# Altium PCB USBAERmini2PCB.PCBDOC (part 2 of 2)
Units mm, origin at the board's own origin, x right, y up, seen from the top; angles counter-clockwise.
Board outline 159.12 x 127.1 mm, 2 copper layers (Top Layer, Bottom Layer); 87 components, 131 nets, 595 pads, 148 vias.
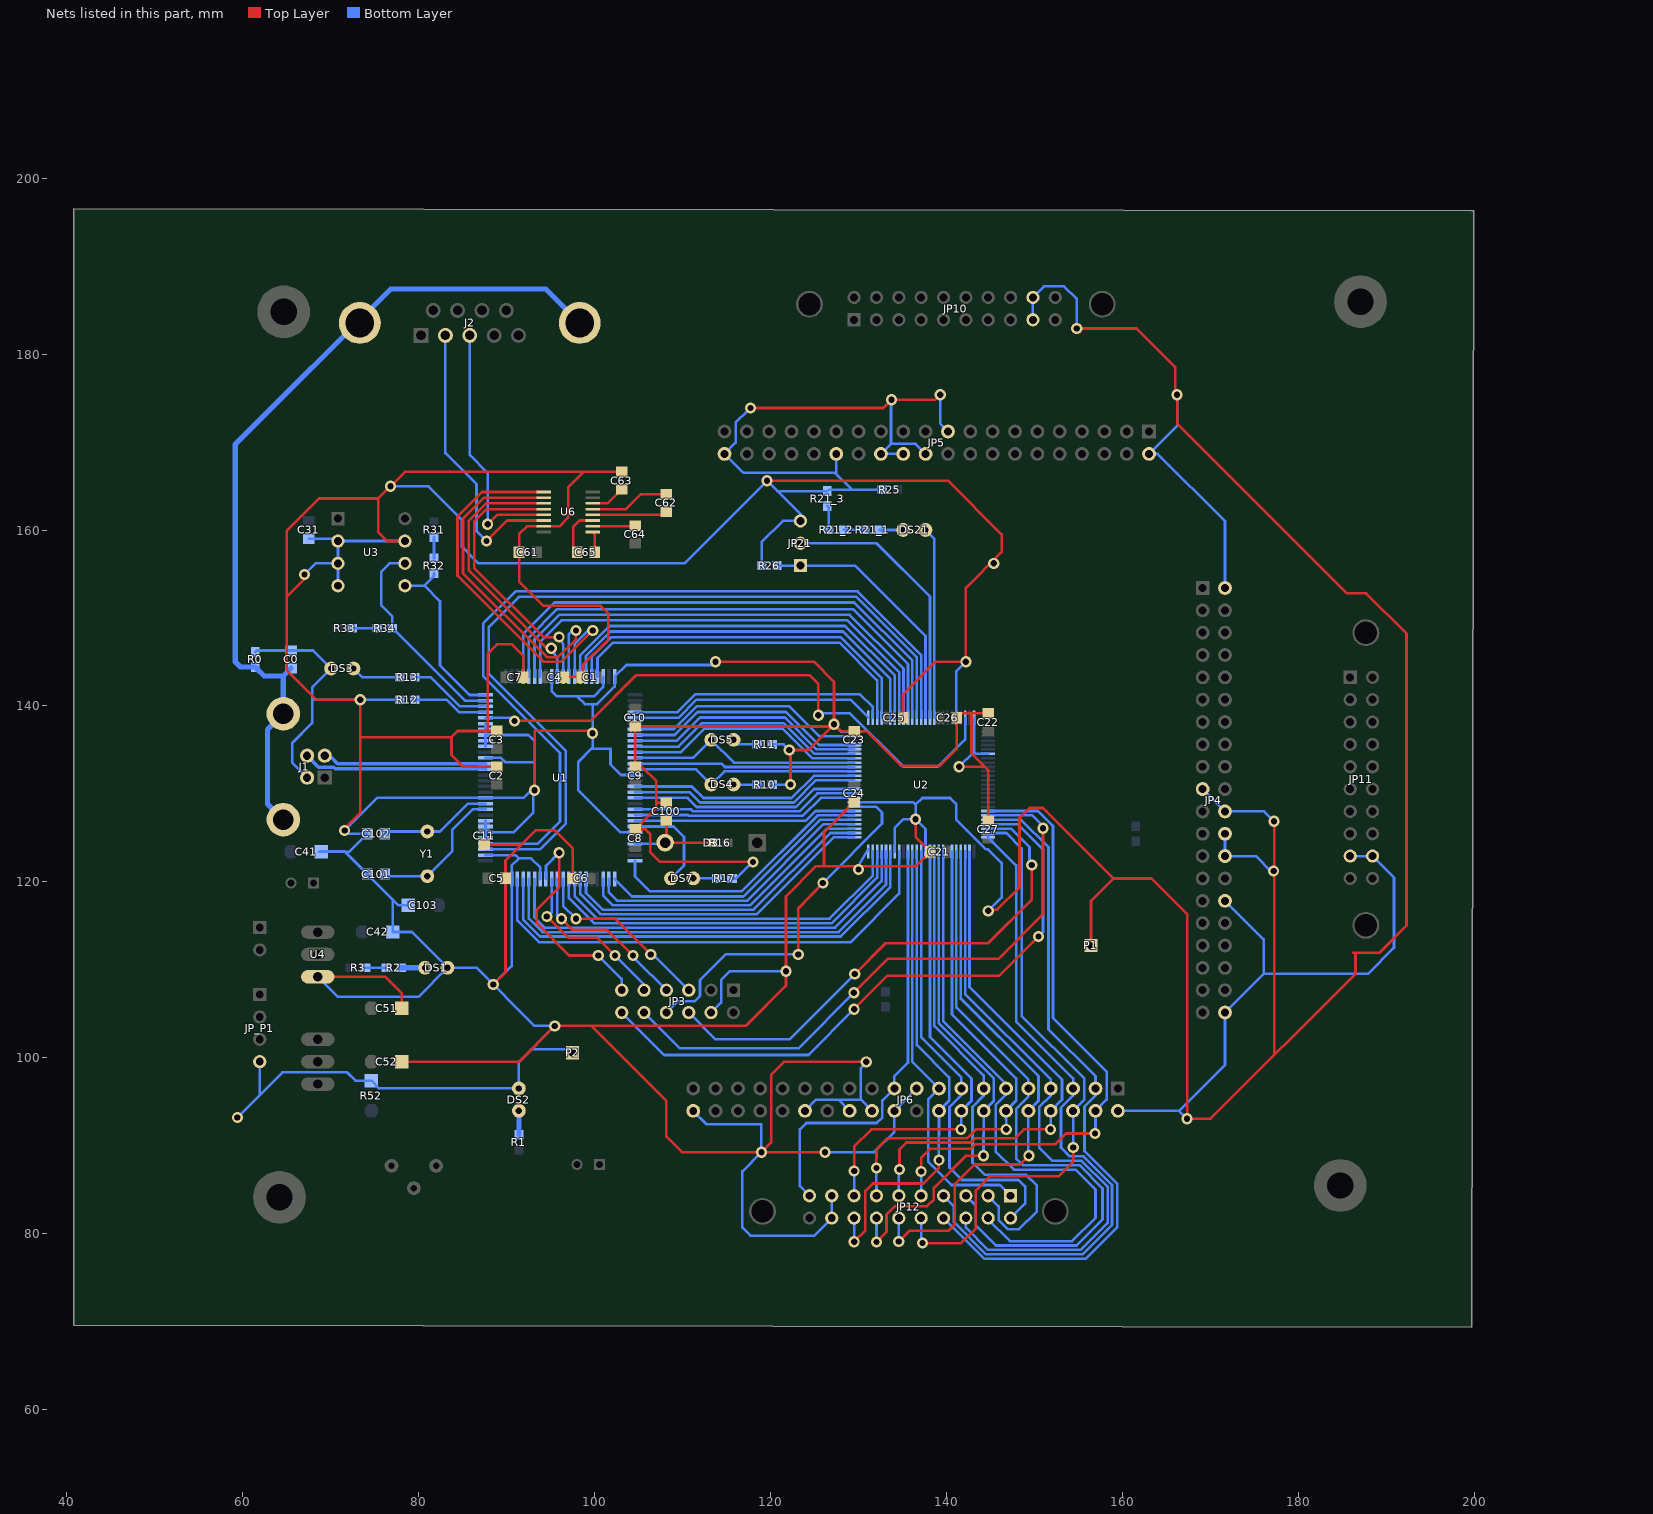
[diagram p2: the nets of this part, all layers, seen from the top]

## Via types
v1: diameter 1.27, hole 0.711, Top Layer to Bottom Layer, 148 vias

## Nets (pads, with @x,y where several pads share a name; then routed paths per layer and width w, separated by ;. In a path a pad name is that pad's centre, name@x,y a point inside that pad or via, vN(x,y) a via of type N, cw(c..) or ccw(c..) an arc to the next point about the centre after c; other vN are vias at no path point) (continued)
AERSEQADD0: JP6.17 JP12.1 U2.65 | length 48
  Bottom Layer w0.3: U2.65@136.16,123.464 136.16,99.554 JP6.17@139.191,96.523 137.975,95.307 137.975,88.175 140.6,85.55 146.098,85.55 JP12.1@147.32,84.328
AERSEQADD1: JP6.15 JP12.2 U2.63 | length 52.2
  Bottom Layer w0.3: U2.63@137.16,123.464 137.16,102.362 141.731,97.791 141.731,95.781 140.375,94.425 140.375,87.525 141.775,86.125 148.225,86.125 148.975,85.375 148.975,83.443 JP12.2@147.32,81.788
AERSEQADD2: JP6.13 JP12.3 U2.60 | length 58.4
  Bottom Layer w0.3: U2.60@138.66,123.464 138.66,103.601 144.271,97.99 144.271,95.696 143,94.425 143,88.1 144.4,86.7 149.075,86.7 150.3,85.475 150.3,82.55 148.275,80.525 147,80.525 145.975,81.55 145.975,83.133 JP12.3@144.78,84.328
AERSEQADD3: JP6.11 JP12.4 U2.58 | length 68.4
  Bottom Layer w0.3: U2.58@139.66,123.464 139.66,104.18 146.811,97.029 146.811,95.816 145.625,94.63 145.625,89.375 147.7,87.3 154.7,87.3 156.975,85.025 156.975,81.825 154.325,79.175 147.25,79.175 144.78,81.645 JP12.4@144.78,81.788
AERSEQADD4: JP6.9 JP12.5 U2.55 | length 74.1
  Bottom Layer w0.3: U2.55@141.16,123.464 141.16,105.728 149.351,97.537 149.351,95.601 147.95,94.2 147.95,88.575 148.725,87.8 155.15,87.8 157.775,85.175 157.775,81.625 154.825,78.675 145.65,78.675 143.375,80.95 143.375,83.193 JP12.5@142.24,84.328
AERSEQADD5: JP6.7 JP12.6 U2.53 | length 71.5
  Bottom Layer w0.3: U2.53@142.16,123.464 142.16,107.268 151.891,97.537 151.891,95.741 150.575,94.425 150.575,89.825 152.1,88.3 155.411,88.3 158.35,85.361 158.35,81.232 155.293,78.175 144.775,78.175 142.24,80.71 JP12.6@142.24,81.788
AERSEQADD6: JP6.5 JP12.7 U2.50 | length 76.3
  Bottom Layer w0.3: JP12.7@139.7,84.328 140.9,83.128 140.9,81.325 144.55,77.675 155.5,77.675 158.85,81.025 158.85,85.568 155.618,88.8 154.05,88.8 153.05,89.8 153.05,94.35 154.431,95.731 154.431,97.664 147.955,104.14 147.955,121.869 U2.50@144.76,125.064
AERSEQADD7: JP6.3 JP12.8 U2.46 | length 78.8
  Bottom Layer w0.3: JP12.8@139.7,81.788 144.313,77.175 155.875,77.175 159.45,80.75 159.45,85.675 155.725,89.4 155.725,94.475 156.971,95.721 156.971,97.918 151.638,103.251 151.638,123.952 148.526,127.064 U2.46@144.76,127.064
AERSEQADD8: JP6.4 JP12.9 U2.44 | length 71.3
  Top Layer w0.3: v1(137.16,87.09) 137.16,88.635 138.2,89.675 142.807,89.675 143.332,90.2 152.425,90.2 153.625,91.4 v1(156.925,91.4)
  Bottom Layer w0.3: JP12.9@137.16,84.328 v1(137.16,87.09) ; U2.44@144.76,128.064 150.447,128.064 152.138,126.373 152.138,104.529 158.242,98.425 158.242,95.254 JP6.4@156.971,93.983 156.971,91.446 v1(156.925,91.4)
AERSEQADD9: JP6.6 JP12.10 U2.49 | length 69.8
  Top Layer w0.3: v1(137.3,78.95) 141.7,78.95 143.375,80.625 143.375,84.95 144.975,86.55 152.8,86.55 154.45,88.2 v1(154.45,89.8)
  Bottom Layer w0.3: v1@137.16,79.16 JP12.10@137.16,81.788 ; U2.49@144.76,125.564 146.851,125.564 148.59,123.825 148.59,104.775 155.702,97.663 155.702,95.254 JP6.6@154.431,93.983 v1(154.45,89.8)
AERSEQADD10: JP6.8 JP12.11 U2.52 | length 59.6
  Top Layer w0.3: v1(134.7,87.325) 134.7,89.6 135.475,90.375 142.8,90.375 143.275,90.85 147.8,90.85 148.825,91.875 v1(151.875,91.875)
  Bottom Layer w0.3: JP12.11@134.62,84.328 v1@134.62,87.12 ; U2.52@142.66,123.464 142.66,108.038 153.162,97.536 153.162,95.254 JP6.8@151.891,93.983 v1(151.875,91.875)
AERSEQADD11: JP6.10 JP12.12 U2.54 | length 62.9
  Top Layer w0.3: v1(134.62,79.12) 135.85,80.35 140.275,80.35 140.975,81.05 140.975,85.6 143.25,87.875 148.4,87.875 v1(149.4,88.875)
  Bottom Layer w0.3: v1(134.62,79.12) JP12.12@134.62,81.788 ; U2.54@141.66,123.464 141.66,106.752 150.495,97.917 150.495,95.127 JP6.10@149.351,93.983 149.351,88.924 v1(149.4,88.875)
AERSEQADD12: JP6.12 JP12.13 U2.56 | length 56
  Top Layer w0.3: v1(132.075,87.475) 132.08,89.605 133.35,90.875 142.4,90.875 143.4,91.875 v1(146.825,91.875)
  Bottom Layer w0.3: v1(132.075,87.475) JP12.13@132.08,84.328 ; U2.56@140.66,123.464 140.66,104.958 147.955,97.663 147.955,95.127 JP6.12@146.811,93.983 v1(146.825,91.875)
AERSEQADD13: JP6.14 JP12.14 U2.59 | length 58.5
  Top Layer w0.3: v1(132.08,79.07) 133.225,80.215 133.225,82.2 134.175,83.15 137.85,83.15 138.6,83.9 138.6,85.225 142.25,88.875 v1(144.25,88.875)
  Bottom Layer w0.3: v1(132.08,79.07) JP12.14@132.08,81.788 ; U2.59@139.16,123.464 139.16,103.918 145.415,97.663 145.415,95.127 JP6.14@144.271,93.983 v1(144.25,88.875)
AERSEQADD14: JP6.16 JP12.15 U2.61 | length 52.6
  Top Layer w0.3: v1(129.54,87.14) 129.54,89.915 131.5,91.875 v1(141.7,91.875)
  Bottom Layer w0.3: JP12.15@129.54,84.328 v1(129.54,87.14) ; U2.61@138.16,123.464 138.16,102.378 142.875,97.663 142.875,95.127 JP6.16@141.731,93.983 v1(141.7,91.875)
AERSEQADD15: JP6.18 JP12.16 U2.64 | length 56.4
  Top Layer w0.3: v1(129.54,79.11) 130.825,80.395 130.825,84.875 131.675,85.725 137.425,85.725 139.175,87.475 v1(139.175,88.375)
  Bottom Layer w0.3: v1(129.54,79.11) JP12.16@129.54,81.788 ; U2.64@136.66,123.464 136.66,101.465 140.335,97.79 140.335,95.127 JP6.18@139.191,93.983 v1(139.175,88.375)
AERSEQREQ: JP6.21 JP12.19 U2.66 | length 49.4
  Bottom Layer w0.3: JP12.19@124.46,84.328 123.375,85.413 123.375,91.875 124.1,92.6 132.1,92.6 132.75,93.25 132.75,95.162 JP6.21@134.111,96.523 134.111,97.916 135.66,99.465 U2.66@135.66,123.464
AGND: C0.2 J1.5 J1.6 J2.10 J2.11 R0.1 | length 97.8
  Bottom Layer w0.6: R0.1@61.468,144.438 59.778,144.438 59.182,145.034 59.182,169.707 76.875,187.4 94.487,187.4 J2.11@98.347,183.54 ; R0.1@61.625,144.281 62.488,143.418 64.656,143.418 ; J1.5@64.656,127.076 62.865,128.867 62.865,137.325 J1.6@64.656,139.116 64.656,143.418 ; C0.2@65.536,144.298 64.656,143.418
CFGEARLYPKT0: U1.58 U2.97 | length 27.6
  Bottom Layer w0.3: U1.58@104.639,136.701 109.142,136.701 111.76,139.319 121.793,139.319 125.548,135.564 U2.97@129.56,135.564
CFGEARLYPKT1: U1.59 U2.96 | length 27.5
  Bottom Layer w0.3: U1.59@104.639,136.051 109.381,136.051 112.014,138.684 121.666,138.684 125.286,135.064 U2.96@129.56,135.064
CFGTS0: U1.60 U2.95 | length 27.2
  Bottom Layer w0.3: U1.60@104.902,135.382 109.601,135.382 112.268,138.049 121.539,138.049 125.024,134.564 U2.95@129.56,134.564
CFGTS1: U1.61 U2.94 | length 27.4
  Bottom Layer w0.3: U1.61@104.639,134.751 109.859,134.751 112.522,137.414 121.412,137.414 124.762,134.064 U2.94@129.56,134.064
DMINUS: J1.2 U1.18 | length 18.6
  Bottom Layer w0.4: J1.2@69.366,134.346 69.929,134.346 70.824,133.451 U1.18@87.639,133.451
DPLUS: J1.3 U1.17 | length 20.9
  Bottom Layer w0.4: J1.3@67.366,134.346 68.662,133.05 70.367,133.05 70.566,132.851 87.589,132.851 U1.17@87.639,132.801
EP2EMPTY: U1.54 U2.2 | length 29.7
  Bottom Layer w0.3: U1.54@104.639,139.301 109.456,139.301 111.506,141.351 130.175,141.351 131.66,139.866 U2.2@131.66,138.664
EP6FULL: U1.55 U2.1 | length 28.2
  Bottom Layer w0.3: U1.55@104.639,138.651 109.568,138.651 111.633,140.716 129.108,140.716 U2.1@131.16,138.664
FD0: U1.34 U2.11 | length 59.8
  Bottom Layer w0.3: U1.34@91.914,143.326 91.914,148.175 95.504,151.765 129.54,151.765 136.16,145.145 U2.11@136.16,138.664
FD1: U1.35 U2.10 | length 57.6
  Bottom Layer w0.3: U1.35@92.564,143.326 92.564,147.809 95.758,151.003 129.413,151.003 135.66,144.756 U2.10@135.66,138.664
FD2: U1.36 U2.9 | length 55.5
  Bottom Layer w0.3: U1.36@93.214,143.326 93.214,147.57 96.012,150.368 129.032,150.368 135.16,144.24 U2.9@135.16,138.664
FD3: U1.37 U2.8 | length 53.4
  Bottom Layer w0.3: U1.37@93.864,143.326 93.864,147.331 96.266,149.733 128.778,149.733 134.66,143.851 U2.8@134.66,138.664
FD4: U1.44 U2.7 | length 46.7
  Bottom Layer w0.3: U1.44@98.414,143.326 98.414,145.785 101.727,149.098 128.524,149.098 134.16,143.462 U2.7@134.16,138.664
FD5: U1.45 U2.6 | length 44.7
  Bottom Layer w0.3: U1.45@99.064,143.326 99.064,145.673 101.854,148.463 128.27,148.463 133.66,143.073 U2.6@133.66,138.664
FD6: U1.46 U2.4 | length 42.6
  Bottom Layer w0.3: U1.46@99.714,143.326 99.714,145.561 101.981,147.828 128.016,147.828 132.66,143.184 U2.4@132.66,138.664
FD7: U1.47 U2.3 | length 40.7
  Bottom Layer w0.3: U1.47@100.364,143.326 100.364,145.449 102.108,147.193 127.889,147.193 132.16,142.922 U2.3@132.16,138.664
FD8: U1.80 U2.81 | length 31
  Bottom Layer w0.3: U1.80@104.639,122.401 104.639,120.636 106.35,118.925 116.766,118.925 125.405,127.564 U2.81@129.56,127.564
FD9: U1.81 U2.80 | length 31.7
  Bottom Layer w0.3: U1.81@102.314,120.326 104.292,118.348 116.951,118.348 125.667,127.064 U2.80@129.56,127.064
FD10: U1.82 U2.79 | length 33.4
  Bottom Layer w0.3: U1.82@101.664,120.326 101.664,118.808 102.624,117.848 117.34,117.848 126.056,126.564 U2.79@129.56,126.564
FD11: U1.83 U2.78 | length 34.5
  Bottom Layer w0.3: U1.83@101.014,120.326 101.014,118.442 102.108,117.348 117.729,117.348 126.445,126.064 U2.78@129.56,126.064
FD12: U1.95 U2.72 | length 49.9
  Bottom Layer w0.3: U1.95@93.214,120.326 93.214,115.955 94.361,114.808 127.381,114.808 132.66,120.087 U2.72@132.66,123.464
FD13: U1.96 U2.71 | length 51.7
  Bottom Layer w0.3: U1.96@92.564,120.326 92.564,115.843 94.107,114.3 127.762,114.3 133.16,119.698 U2.71@133.16,123.464
FD14: U1.97 U2.70 | length 53.5
  Bottom Layer w0.3: U1.97@91.914,120.326 91.914,115.731 93.853,113.792 128.016,113.792 133.66,119.436 U2.70@133.66,123.464
FD15: U1.98 U2.68 | length 56.2
  Bottom Layer w0.3: U1.98@91.264,120.326 91.264,115.619 93.726,113.157 129.159,113.157 134.66,118.658 U2.68@134.66,123.464
FIFOADDR0: U1.71 U2.86 | length 25.9
  Bottom Layer w0.3: U1.71@104.639,128.251 111.017,128.251 111.252,128.016 123.317,128.016 125.365,130.064 U2.86@129.56,130.064
FIFOADDR1: U1.72 U2.85 | length 25.8
  Bottom Layer w0.3: U1.72@104.639,127.601 110.651,127.601 110.744,127.508 123.698,127.508 125.754,129.564 U2.85@129.56,129.564
GND: C0.1 C1.1 C2.1 C3.1 C4.1 C5.1 C6.1 C7.1 C8.1 C9.1 C10.1 C11.1 C21.2 C22.2 C23.2 C24.2 C25.2 C26.2 C27.2 C31.1 C41.2 C42.2 C51.2 C52.2 C61.1 C63.1 C100.2 C101.2 C102.2 C103.2 DS1.K DS2.K DS3.K J1.4 JP3.8 JP4.2 JP4.19 JP4.22 JP4.24 JP4.26 JP4.30 JP4.40 JP5.2 JP5.19 JP5.22 JP5.24 JP5.26 JP5.30 JP5.40 JP6.2 JP6.19 JP6.22 JP6.24 JP6.26 JP6.30 JP6.40 JP10.17 JP10.18 JP11.17 JP11.18 JP12.17 JP12.18 JP21.3 JP_P1.4 P1.1 P2.1 R0.2 R10.1 R11.1 R12.2 R17.1 R21_3.1 R25.1 R26.2 R52.2 U1.2 U1.5 U1.6 U1.7 U1.8 U1.12 U1.19 U1.21 U1.22 U1.23 U1.24 U1.25 U1.39 U1.48 U1.50 U1.65 U1.75 U1.94 U1.99 U2.21 U2.25 U2.31 U2.62 U2.69 U2.75 U2.84 U2.100 U3.2 U3.3 U3.4 U3.7 U4.1 U6.15 | length 1487.5
  Top Layer w0.3: 65.038,152.414 67.056,154.432 v1(67.056,154.94) ; U4.1@68.577,109.217 76.258,109.217 78.114,107.361 C51.2@78.114,105.655 ; v1@71.501,125.984 73.406,127.889 v1(73.406,140.716) 68.384,140.716 65.038,144.062 65.038,159.907 68.707,163.576 75.438,163.576 ; 73.456,136.45 83.775,136.45 ; C52.2@78.114,99.559 91.431,99.559 v1(95.504,103.632) 117.221,103.632 121.793,108.204 121.793,118.364 125.222,121.793 136.547,121.793 C21.2@138.202,123.448 136.525,125.125 v1(136.525,127.127) ; U3.7@78.486,158.75 76.454,158.75 75.438,159.766 75.438,163.576 ; 86.366,133.09 C2.1@88.896,133.09 ; 86.864,133.09 85.11,133.09 83.775,134.425 83.775,136.45 ; C11.1@87.507,124.232 91.424,124.232 91.572,124.084 ; 87.88,137.154 87.88,145.93 88.95,147 90.65,147 91.942,145.708 C7.1@91.942,143.26 C7.1@91.942,142.752 ; v1(88.519,108.331) 89.91,109.722 89.91,122.422 93.345,125.857 95.516,125.857 97.542,123.831 C6.1@97.542,119.882 ; C3.1@88.896,137.154 85.848,137.154 84.479,137.154 83.775,136.45 ; v1(93.218,130.429) 93.218,137.154 v1@99.65,137.175 ; C4.1@96.514,143.26 96.577,143.322 98.724,143.322 98.724,144.698 101.6,147.574 101.6,150.495 100.711,151.384 94.234,151.384 91.466,154.152 91.466,159.538 92.355,160.427 96.038,160.427 97.028,161.417 97.028,164.846 98.802,166.62 ; 99.695,103.632 108.204,95.123 108.204,91.059 109.982,89.281 v1(126.219,89.281) ; C63.1@103.12,166.618 103.118,166.62 78.482,166.62 75.438,163.576 ; C10.1@104.132,137.154 C10.1@104.652,137.674 v1@127.006,137.674 ; C10.1@104.644,137.667 C9.1@104.644,133.09 105.416,133.09 107.061,131.445 107.061,128.395 C8.1@104.644,125.978 105.847,125.978 106.35,125.475 106.35,123.425 107.5,122.275 v1@117.825,122.275 ; 107.061,129.1 107.155,129.006 C100.2@108.208,129.006 ; v1(113.792,145.034) 124.966,145.034 127.254,142.746 v1(127.254,137.922) ; v1(117.75,173.875) 132.85,173.875 v1(133.775,174.8) 138.75,174.8 v1(139.325,175.375) ; v1(118.999,89.281) 120.1,90.382 120.1,98.075 121.575,99.55 v1(130.925,99.55) ; v1(119.634,165.608) 140.208,165.608 146.304,159.512 146.304,157.48 142.24,153.416 v1(142.24,145.034) 138.811,145.034 135.102,141.325 C25.2@135.102,138.68 ; v1(122.301,131.064) 122.301,134.874 v1(122.174,135.001) 124.333,135.001 v1(127.254,137.922) ; 126.111,121.793 126.111,125.633 C24.2@129.536,129.058 ; C26.2@141.198,138.68 141.198,135.102 139.319,133.223 134.874,133.223 130.963,137.134 128.042,137.134 v1(127.254,137.922) ; v1(141.478,133.096) 144.399,133.096 ; C26.2@141.684,139.166 C22.2@144.784,139.166 ; 142.875,139.166 142.875,134.62 144.784,132.711 C27.2@144.784,126.974 ; v1@144.653,116.84 145.796,116.84 148.336,119.38 148.336,127.254 149.479,128.397 151.003,128.397 159.004,120.396 ; v1(154.85,182.9) 161.65,182.9 166.025,178.525 v1@166.025,175.55 ; P1.1@156.464,112.776 156.464,117.856 159.004,120.396 ; v1(166.25,175.375) 166.25,172.1 185.55,152.8 187.75,152.8 192.325,148.225 192.325,115.025 189.25,111.95 186.3,111.95 ; 177.275,100.3 v1(177.275,126.9) ; 186.525,111.95 186.525,109.55 170.066,93.091 v1(167.386,93.091) 167.386,116.332 163.322,120.396 159.004,120.396
  Bottom Layer w0.3: v1(59.436,93.218) 64.568,98.35 71.925,98.35 72.857,97.418 R52.2@74.667,97.418 75.554,96.531 DS2.K@91.429,96.531 91.429,99.557 v1(95.504,103.632) 93.218,103.632 86.603,110.247 DS1.K@83.323,110.247 ; R0.2@61.468,146.138 61.628,146.298 68.056,146.298 DS3.K@70.093,144.261 67.945,142.113 67.945,138.049 65.659,135.763 65.659,133.553 J1.4@67.366,131.846 ; 61.976,95.758 JP_P1.4@61.976,99.568 ; v1(67.056,154.94) 68.326,156.21 U3.3@70.866,156.21 ; C31.1@67.56,159.01 70.606,159.01 U3.2@70.866,158.75 ; 67.945,140.716 R12.2@77.89,140.716 ; U4.1@68.577,109.217 70.86,106.934 80.01,106.934 DS1.K@83.323,110.247 ; C41.2@68.707,123.444 C41.2@68.97,123.444 ; C41.2@68.97,123.453 71.642,123.453 77.755,117.339 C103.2@78.858,117.339 C103.2@78.858,117.72 ; U3.4@70.866,153.67 U3.2@70.866,158.75 ; 71.65,123.444 72.166,123.444 C102.2@74.194,125.472 72.013,125.472 v1(71.628,125.857) 75.322,129.551 91.959,129.551 93.218,130.81 93.218,136.017 92.534,136.701 U1.23@87.639,136.701 ; v1(76.835,164.973) 81.153,164.973 84.963,161.163 84.963,158.115 86.868,156.21 110.236,156.21 v1@119.675,165.649 ; 77.098,117.996 C42.2@77.098,114.309 79.262,114.309 DS1.K@83.323,110.247 ; U3.7@78.486,158.75 U3.2@70.866,158.75 ; U1.2@87.639,123.051 91.071,123.051 91.44,122.682 ; U1.5@87.639,125.001 U1.8@87.639,126.951 ; U1.6@87.639,125.651 90.853,125.651 93.08,127.878 v1@93.08,130.672 ; U1.19@87.639,134.101 89.419,134.101 89.916,133.604 93.218,133.604 ; U1.21@87.639,135.401 U1.25@87.639,138.001 ; v1(88.519,108.331) 90.614,110.426 90.614,121.856 91.44,122.682 ; 92.844,100.972 97.148,100.972 P2.1@97.536,100.584 ; U1.94@93.864,120.326 93.864,121.655 92.837,122.682 91.44,122.682 ; U1.39@95.164,143.326 95.164,141.691 95.758,141.097 99.949,141.097 101.014,142.162 U1.48@101.014,143.326 ; 98.044,141.097 98.933,140.208 100.33,140.208 102.314,142.192 U1.50@102.314,143.326 103.641,144.653 v1@113.665,144.653 ; 99.695,135.128 101.854,135.128 101.854,133.35 103.053,132.151 U1.65@104.639,132.151 ; 99.822,140.208 99.822,135.255 98.171,133.604 98.171,130.429 102.949,125.651 U1.75@104.639,125.651 ; JP6.40@111.251,93.983 112.778,92.456 118.999,92.456 v1(118.999,89.281) 116.825,87.107 116.825,80.725 117.75,79.8 125.012,79.8 JP12.18@127,81.788 JP12.17@127,84.328 ; JP3.8@113.284,105.156 114.427,106.299 114.427,108.839 115.443,109.855 v1(121.793,109.855) ; JP5.40@114.807,168.659 116.078,169.93 116.078,172.212 v1@117.475,173.609 ; JP5.40@114.935,168.529 116.967,166.497 127.38,166.497 129.285,164.592 ; R17.1@115.658,120.396 116.096,120.396 v1@117.975,122.275 ; R26.2@119.038,155.956 119.038,158.613 121.461,161.036 JP21.3@123.444,161.036 123.444,161.798 v1(119.634,165.608) ; R10.1@120.23,131.064 v1(122.301,131.064) ; R11.1@120.23,135.636 121.539,135.636 v1(122.174,135.001) ; 120.816,164.426 R21_3.1@126.492,164.426 ; JP6.30@123.951,93.983 125.218,95.25 130.304,95.25 ; v1(126.219,89.281) 131.806,89.281 134.111,91.586 JP6.22@134.111,93.983 JP6.19@136.651,96.523 ; R21_3.1@126.658,164.592 R25.1@132.754,164.592 ; v1(127.254,137.922) 128.112,137.064 U2.100@129.56,137.064 ; 127.507,166.497 JP5.30@127.507,168.659 ; 127.764,95.25 JP6.26@129.031,93.983 ; U2.84@129.56,129.064 136.239,129.064 136.525,128.778 ; v1@129.921,121.666 U2.75@131.16,123.718 ; v1@131.15,99.675 130.304,98.829 130.304,95.25 ; JP6.24@131.571,93.983 130.304,95.25 ; v1(133.775,174.8) 133.731,174.756 133.731,169.803 ; U2.69@134.16,123.464 134.16,126.159 135.128,127.127 v1(136.525,127.127) ; JP5.24@135.127,168.659 JP5.26@132.587,168.659 133.731,169.803 ; U2.62@137.66,123.464 137.66,125.992 v1(136.525,127.127) ; JP5.22@137.667,168.659 136.523,169.803 133.731,169.803 ; v1(139.325,175.375) 139.325,172.081 JP5.19@140.207,171.199 ; U2.21@141.16,138.664 141.16,143.954 v1(142.24,145.034) ; v1(141.478,133.096) 143.16,134.778 ; U2.25@143.16,138.664 143.16,134.778 ; U2.31@144.76,134.564 143.374,134.564 143.16,134.778 ; v1(144.78,116.713) 146.304,118.237 146.304,122.174 144.78,123.698 144.526,123.698 141.13,127.094 141.13,128.872 140.462,129.54 137.287,129.54 136.525,128.778 ; JP10.17@149.86,183.896 JP10.18@149.86,186.436 151.124,187.7 153.4,187.7 154.85,186.25 v1(154.85,182.9) ; JP6.2@159.511,93.983 166.494,93.983 ; v1(166.25,175.375) 166.25,171.842 JP5.2@163.067,168.659 164.041,168.659 171.701,160.999 JP4.2@171.701,153.415 ; v1(167.386,93.091) 166.494,93.983 ; JP4.19@169.161,130.555 JP4.22@171.701,128.015 176.135,128.015 v1@177.05,127.1 ; JP4.30@171.701,117.855 176.096,113.46 176.096,109.55 ; JP4.24@171.701,125.475 JP4.26@171.701,122.935 175.215,122.935 v1@176.95,121.2 ; JP11.17@185.928,122.936 JP11.18@188.468,122.936 190.9,120.504 190.9,112.525 187.925,109.55 176.096,109.55 ; v1(136.525,127.127) 136.525,128.778 ; 166.494,93.983 171.701,99.19 JP4.40@171.701,105.155 176.096,109.55
  other v1: 177.225,121.25 130.048,121.412 118.05,122.275 99.8,136.9 145.415,156.21
IFCLOCK: U1.26 U2.23 | length 66.9
  Top Layer w0.3: v1(90.932,138.303) 99.568,138.303 104.775,143.51 124.46,143.51 125.476,142.494 v1(125.476,138.938)
  Bottom Layer w0.3: U1.26@87.639,138.651 90.772,138.651 v1@90.805,138.684 ; v1@125.349,139.192 129.032,139.192 135.128,133.096 139.065,133.096 142.16,136.191 U2.23@142.16,138.664
INT0: U1.67 U2.90 | length 26.5
  Bottom Layer w0.3: U1.67@104.639,130.851 111.084,130.851 112.395,129.54 122.428,129.54 124.952,132.064 U2.90@129.56,132.064
INT1: U1.68 U2.89 | length 26.5
  Bottom Layer w0.3: U1.68@104.639,130.201 110.845,130.201 112.014,129.032 122.682,129.032 125.214,131.564 U2.89@129.56,131.564
NetC62_1: C62.1 U6.5 | length 9.1
  Top Layer w0.3: U6.5@99.803,162.377 103.602,162.377 105.303,164.078 C62.1@108.2,164.078
NetC62_2: C62.2 U6.4 | length 8.5
  Top Layer w0.3: U6.4@99.803,161.727 107.849,161.727 C62.2@108.2,162.078
NetC63_2: C63.2 U6.6 | length 4
  Top Layer w0.3: U6.6@99.803,163.027 101.529,163.027 C63.2@103.12,164.618
NetC64_2: C64.2 U6.2 | length 4.9
  Top Layer w0.3: U6.2@99.803,160.427 104.577,160.427 C64.2@104.652,160.502
NetC65_1: C65.1 U6.3 | length 5.5
  Top Layer w0.3: C65.1@98.05,157.476 97.625,157.901 97.625,160.375 98.327,161.077 U6.3@99.803,161.077
NetC65_2: C65.2 U6.1 | length 2.4
  Top Layer w0.3: U6.1@99.803,159.777 100.05,159.53 C65.2@100.05,157.476
NetC100_1: C100.1 D3.1 R16.1 U1.77 | length 11.5
  Top Layer w0.3: C100.1@108.208,127.006 108.208,124.614 D3.1@108.054,124.46 R16.1@113.45,124.46
  Bottom Layer w0.3: U1.77@104.639,124.351 107.945,124.351 D3.1@108.054,124.46
NetC101_1: C101.1 U1.10 Y1.2 | length 16.1
  Bottom Layer w0.3: C101.1@76.194,120.9 76.444,120.65 Y1.2@81.026,120.65 83.875,123.499 83.875,125.95 86.176,128.251 U1.10@87.639,128.251
NetC102_1: C102.1 U1.11 Y1.1 | length 12.9
  Bottom Layer w0.3: C102.1@76.194,125.472 76.452,125.73 82.455,125.73 85.626,128.901 U1.11@87.639,128.901
NetDS1_1: DS1.A R2.1 | length 2.7
  Bottom Layer w0.6: R2.1@78.066,110.236 80.772,110.236 DS1.A@80.783,110.247
NetDS2_1: DS2.A R1.1 | length 2.7
  Bottom Layer w0.6: DS2.A@91.429,93.991 91.44,93.98 R1.1@91.44,91.274
NetDS3_1: DS3.A R13.1 | length 5.7
  Bottom Layer w0.3: DS3.A@72.633,144.261 73.638,143.256 R13.1@77.89,143.256
NetDS4_2: DS4.K R10.2 | length 3.2
  Bottom Layer w0.3: DS4.K@115.835,131.075 118.618,131.064 R10.2@119.038,131.064
NetDS5_2: DS5.K R11.2 | length 3
  Bottom Layer w0.3: DS5.K@115.835,136.155 116.354,135.636 R11.2@118.618,135.636
NetDS7_1: DS7.A U1.74 | length 11.4
  Bottom Layer w0.3: U1.74@104.639,126.301 109.024,126.301 110.2,125.125 110.2,121.884 DS7.A@108.723,120.407
NetDS7_2: DS7.K R17.2 | length 2.7
  Bottom Layer w0.3: DS7.K@111.263,120.407 R17.2@113.969,120.407
NetDS21_1: DS21.A U2.16 | length 21.8
  Bottom Layer w0.3: DS21.A@137.657,160.009 138.66,159.006 U2.16@138.66,138.664
NetDS21_2: DS21.K R21_1.2 | length 2.7
  Bottom Layer w0.3: R21_1.2@132.422,160.02 132.433,160.009 DS21.K@135.117,160.009
NetJ2_2: J2.2 U6.14 | length 32.8
  Top Layer w0.3: v1(87.757,158.75) 90.084,161.077 U6.14@94.253,161.077
  Bottom Layer w0.3: J2.2@83.082,182.12 83.082,168.759 86.614,165.227 86.614,159.893 v1(87.757,158.75)
NetJ2_3: J2.3 U6.13 | length 29.1
  Top Layer w0.3: v1(87.884,160.655) 88.956,161.727 U6.13@94.253,161.727
  Bottom Layer w0.3: J2.3@85.852,182.12 85.852,168.529 87.884,166.497 v1(87.884,160.655)
NetJP3_9: JP3.9 U2.48 | length 58.4
  Top Layer w0.3: v1(129.614,109.548) 133.096,113.03 144.78,113.03 149.733,117.983 v1(149.733,121.92)
  Bottom Layer w0.3: JP3.9@110.744,105.156 113.792,102.108 122.174,102.108 v1(129.614,109.548) ; U2.48@144.76,126.064 147.367,126.064 149.479,123.952 v1@149.479,121.92
NetJP3_10: JP3.10 U2.83 | length 42.2
  Top Layer w0.3: v1(123.19,111.76) 123.19,116.967 v1(125.984,119.888)
  Bottom Layer w0.3: JP3.10@108.204,105.156 109.474,106.426 111.379,106.426 112.014,107.061 112.014,108.839 114.935,111.76 v1(123.19,111.76) ; v1(125.984,119.888) 132.715,126.619 132.715,127.889 132.04,128.564 U2.83@129.56,128.564
NetJP3_11: JP3.11 U2.45 | length 69.9
  Top Layer w0.3: v1(129.509,107.411) 133.35,111.252 145.923,111.252 151.003,116.332 v1(151.003,126.111)
  Bottom Layer w0.3: JP3.11@105.664,105.156 109.728,101.092 123.19,101.092 v1(129.509,107.411) ; U2.45@144.76,127.564 149.804,127.564 v1@151.003,126.365
NetJP3_12: JP3.12 U2.47 | length 72.5
  Top Layer w0.3: v1(129.54,105.537) 133.35,109.347 146.05,109.347 v1(150.495,113.792)
  Bottom Layer w0.3: JP3.12@103.124,105.156 107.95,100.33 124.333,100.33 v1(129.54,105.537) ; U2.47@144.76,126.564 148.137,126.564 151.003,123.698 151.003,114.3 v1(150.495,113.792)
NetR2_2: R2.2 R3.1 | length 2.4
  Bottom Layer w0.3: R3.1@74.002,110.236 R2.2@76.366,110.236
NetR12_1: R12.1 U1.27 | length 8.6
  Bottom Layer w0.3: R12.1@79.59,140.716 83.185,140.716 84.6,139.301 U1.27@87.639,139.301
NetR13_2: R13.2 U1.28 | length 9.4
  Bottom Layer w0.3: R13.2@79.59,143.256 81.419,143.256 84.724,139.951 U1.28@87.639,139.951
NetR21_1_1: R21_1.1 R21_2.2 | length 2.4
  Bottom Layer w0.3: R21_2.2@128.358,160.02 R21_1.1@130.722,160.02
NetR21_2_1: R21_2.1 R21_3.2 | length 2.8
  Bottom Layer w0.3: R21_3.2@126.492,162.726 126.658,162.56 R21_2.1@126.658,160.02
NetR31_1: R31.1 R32.2 | length 2.4
  Bottom Layer w0.3: R32.2@81.788,156.806 R31.1@81.788,159.17
NetR32_1: R32.1 U1.30 U3.5 | length 20.5
  Bottom Layer w0.3: U3.5@78.486,153.67 80.684,153.67 ; R32.1@81.788,155.106 81.788,154.774 80.684,153.67 ; U1.30@87.639,141.251 85.825,141.251 82.462,144.614 82.462,151.892 80.684,153.67
NetR33_2: R33.2 R34.2 | length 2.9
  Bottom Layer w0.3: R33.2@72.478,148.844 R34.2@75.35,148.844
NetR34_1: R34.1 U1.29 U3.6 | length 24
  Bottom Layer w0.3: U3.6@78.486,156.21 76.735,156.21 75.775,155.25 75.775,151.45 77.05,150.175 R34.1@77.05,148.844 85.293,140.601 U1.29@87.639,140.601
PE0: U1.86 U2.77 | length 36.5
  Bottom Layer w0.3: U1.86@99.064,120.326 99.064,118.741 100.965,116.84 118.11,116.84 126.834,125.564 U2.77@129.56,125.564
PE1: U1.87 U2.76 | length 37.4
  Bottom Layer w0.3: U1.87@98.414,120.326 98.414,118.629 100.711,116.332 118.491,116.332 127.223,125.064 U2.76@129.56,125.064
PE2: U1.88 U2.74 | length 41.7
  Bottom Layer w0.3: U1.88@97.764,120.326 97.764,118.39 100.33,115.824 126.746,115.824 131.66,120.738 U2.74@131.66,123.464
PE3: U1.89 U2.73 | length 43.5
  Bottom Layer w0.3: U1.89@97.114,120.326 97.114,118.151 99.949,115.316 127,115.316 132.16,120.476 U2.73@132.16,123.464
PKTEND: U1.73 U2.82 | length 25.4
  Bottom Layer w0.3: U1.73@104.639,126.951 124.03,126.951 125.143,128.064 U2.82@129.56,128.064
RESETCPLD: U1.57 U2.99 | length 27.4
  Bottom Layer w0.3: U1.57@104.639,137.351 109.03,137.351 111.633,139.954 122.174,139.954 125.564,136.564 U2.99@129.56,136.564
RUNMONITOR: DS4.A U1.64 U2.91 | length 26.3
  Bottom Layer w0.3: U1.64@104.639,132.801 111.569,132.801 DS4.A@113.295,131.075 114.784,132.564 U2.91@129.56,132.564
RUNSEQUENCER: DS5.A U1.62 U2.93 | length 26.8
  Bottom Layer w0.3: U1.62@104.639,134.101 111.241,134.101 DS5.A@113.295,136.155 115.886,133.564 U2.93@129.56,133.564
RXD0: U1.41 U6.12 | length 31.3
  Top Layer w0.3: U6.12@94.253,162.377 87.773,162.377 86.36,160.964 86.36,155.702 94.234,147.828 v1(96.012,147.828)
  Bottom Layer w0.3: v1(96.012,147.828) 96.464,146.995 U1.41@96.464,143.326
RXD1: U1.43 U6.9 | length 44.5
  Top Layer w0.3: U6.9@94.253,164.327 87.238,164.327 84.455,161.544 84.455,154.813 94.234,145.034 96.266,145.034 v1(99.822,148.59)
  Bottom Layer w0.3: U1.43@97.764,143.326 97.764,147.04 v1@99.314,148.59
SLOE: U1.69 U2.87 | length 26.2
  Bottom Layer w0.3: U1.69@104.639,129.551 110.606,129.551 111.633,128.524 122.936,128.524 124.976,130.564 U2.87@129.56,130.564
SLRD: U1.3 U2.12 | length 96.1
  Bottom Layer w0.3: U1.3@87.639,123.701 93.856,123.701 96.774,126.619 96.774,134.874 88.011,143.637 88.011,148.971 91.44,152.4 129.794,152.4 136.66,145.534 U2.12@136.66,138.664
SLWR: U1.4 U2.13 | length 97
  Bottom Layer w0.3: U1.4@87.639,124.351 93.581,124.351 96.103,126.873 96.103,134.656 87.376,143.383 87.376,149.352 91.059,153.035 129.921,153.035 137.16,145.796 U2.13@137.16,138.664
SYNCHIN: JP21.1 R26.1 U2.14 | length 29.5
  Bottom Layer w0.3: R26.1@120.738,155.956 129.667,155.956 137.66,147.963 U2.14@137.66,138.664
SYNCHOUT: JP21.2 U2.15 | length 31
  Bottom Layer w0.3: JP21.2@123.444,158.496 132.08,158.496 138.16,152.416 U2.15@138.16,138.664
TCK: JP3.3 U1.90 | length 20.8
  Top Layer w0.3: v1(97.917,115.824) 102.362,115.824 v1(106.426,111.76)
  Bottom Layer w0.3: U1.90@96.464,120.326 96.464,117.277 v1@97.79,115.951 ; v1@106.948,111.492 110.871,107.569 JP3.3@110.998,107.569
TDI: JP3.5 U1.92 | length 19
  Top Layer w0.3: v1(94.615,116.078) 97.028,113.665 100.33,113.665 v1(102.362,111.633)
  Bottom Layer w0.3: v1@94.488,115.824 95.164,116.5 U1.92@95.164,120.326 ; v1@102.804,111.191 105.664,108.331 JP3.5@105.664,107.696
TDO: JP3.4 U1.91 | length 19
  Top Layer w0.3: v1(96.266,115.824) 97.536,114.554 101.473,114.554 v1(104.394,111.633)
  Bottom Layer w0.3: 95.758,116.205 95.814,116.261 U1.91@95.814,120.326 ; v1@104.709,111.191 JP3.4@108.204,107.696
TMS: JP3.6 U1.93 | length 25.6
  Top Layer w0.3: v1(96.012,123.317) 96.012,119.38 93.472,116.84 93.472,115.316 97.155,111.633 v1(100.457,111.633)
  Bottom Layer w0.3: U1.93@94.514,120.326 94.514,121.819 v1(96.012,123.317) ; v1@100.899,111.191 103.124,108.966 JP3.6@103.124,107.696
TXD0: U1.40 U6.11 | length 31.4
  Top Layer w0.3: U6.11@94.253,163.027 87.716,163.027 85.725,161.036 85.725,155.448 94.615,146.558 v1(95.123,146.558)
  Bottom Layer w0.3: v1(95.123,146.558) 95.814,145.359 U1.40@95.814,143.326
TXD1: U1.42 U6.10 | length 40.6
  Top Layer w0.3: U6.10@94.253,163.677 87.477,163.677 85.09,161.29 85.09,155.067 94.615,145.542 95.885,145.542 97.917,147.574 v1(97.917,148.59)
  Bottom Layer w0.3: U1.42@97.114,143.326 97.114,148.168 v1@97.663,148.717
UNUSED: U1.63 U2.92 | length 25.1
  Bottom Layer w0.3: U1.63@104.639,133.451 114.453,133.451 114.84,133.064 U2.92@129.56,133.064
pads on no net: J2.1 J2.4 J2.5 J2.6 J2.7 J2.8 J2.9 JP3.1 JP3.2 JP4.1 JP4.20 JP4.23 JP4.25 JP4.27 JP4.28 JP4.31 JP4.32 JP4.33 JP4.34 JP4.35 JP4.36 JP4.37 JP4.38 JP4.39 JP5.1 JP5.20 JP5.23 JP5.25 JP5.27 JP5.28 JP5.31 JP5.32 JP5.33 JP5.34 JP5.35 JP5.36 JP5.37 JP5.38 JP5.39 JP6.1 JP6.20 JP6.23 JP6.25 JP6.27 JP6.28 JP6.31 JP6.32 JP6.33 JP6.34 JP6.35 JP6.36 JP6.37 JP6.38 JP6.39 JP10. JP11. JP12. R51.2 U1.13 U1.14 U1.15 U1.31 U1.32 U1.51 U1.52 U1.56 U1.70 U1.76 U1.100 U6.7 U6.8

## Polygon pours and split planes (outlines as drawn)
AGND on Bottom Layer (solid, remove dead copper, shelved): 64.656,127.076 56.9,127.076 56.9,192.85 99.075,192.85 99.075,182.9 94.575,187.4 77.15,187.4 59.457,169.707 59.457,145.925 60.944,144.438 65.536,144.438 65.536,139.116 64.02,137.6 64.02,127.076
GND on Bottom Layer (solid, remove dead copper, shelved): 56.925,76.625 194.05,76.625 194.05,192.85 57.025,192.85
GND on Top Layer (solid, remove dead copper, shelved): 56.925,76.575 56.925,192.85 194.1,192.85 194.1,76.575

## Keep-outs
Keep-Out Layer:
  lines w0.3: 56.925,76.5 56.925,193.05 ; 57.025,76.575 194.2,76.575 ; 57.08,192.822 194.775,192.85 ; 194.1,76.575 194.1,192.75

## Other copper
Top Layer:
  text "PassThrough" at 125.95,180.2 h1.52 r180
  text "GND" at 116.586,160.401 h1.52
  text "Fifo" at 127.925,159.825 h1.52
  text "SO" at 118.11,157.988 h1.52
  text "SI" at 118.364,155.448 h1.52
  text "BkPt" at 74.549,143.764 h1.52
  text "Sequencer" at 109.474,139.065 h1.52
  text "Monitor" at 110.744,127.127 h1.52
  text "5V" at 70.358,119.253 h1.52
  text "Monitor" at 183.475,113.975 h1.52 r90
  text "3.3V" at 78.2,113.175 h1.52
  text "3.3V" at 59.817,110.998 h1.52 r90
  text "5V" at 57.531,106.426 h1.52
  text "3V" at 57.531,103.886 h1.52
  text "Sequencer" at 137.175,101.225 h1.52
  text "1.8V" at 59.817,97.663 h1.52 r90
  text "1.8V" at 82.85,94.55 h1.52
  text "GND" at 62.738,93.599 h1.52 r90
  text "1.8V" at 96.75,83.8 h1.52

## Silkscreen, mask and mechanical layers (free items; w line width, h text height)
Drill Drawing:
  text "Drill Drawing." at 184.225,72.75 h1.52
  text ".LEGEND" at 171.2,72.475 h1.52

## Text inside footprints (layer, text, board x,y; h text height)
J1: Mechanical 1 "PCB Edge" at 54.681,138.748 h0.25 r270
J2: Top Overlay "1" at 80.062,178.665 h1.5; Top Overlay "5" at 90.892,178.665 h1.5; Top Overlay "9" at 89.507,188.065 h1.5; Top Overlay "6" at 81.197,188.065 h1.5
JP3: Top Overlay "7" at 118.364,105.664 h1.27 r180; Top Overlay "1" at 118.364,108.204 h1.27 r180; Top Overlay "6" at 101.092,108.204 h1.27 r180; Top Overlay "12" at 101.092,105.664 h1.27 r180
JP10: Top Overlay "2" at 127,185.928 h1.27; Top Overlay "1" at 127,183.388 h1.27; Top Overlay "19" at 153.924,183.388 h1.27; Top Overlay "20" at 153.924,185.928 h1.27
JP11: Top Overlay "2" at 187.96,145.796 h1.27 r270; Top Overlay "1" at 185.42,145.796 h1.27 r270; Top Overlay "19" at 185.42,118.872 h1.27 r270; Top Overlay "20" at 187.96,118.872 h1.27 r270
JP12: Top Overlay "2" at 149.86,82.296 h1.27 r180; Top Overlay "1" at 149.86,84.836 h1.27 r180; Top Overlay "19" at 122.936,84.836 h1.27 r180; Top Overlay "20" at 122.936,82.296 h1.27 r180